# Altium PCB PCB1.PcbDoc
Units mm, origin at the board's own origin, x right, y up, seen from the top; angles counter-clockwise.
Board outline 152.4 x 101.6 mm, 2 copper layers (Top Layer, Bottom Layer); 46 components, 34 nets, 152 pads, 0 vias.
Unrouted connection lines stored in the file: 4.
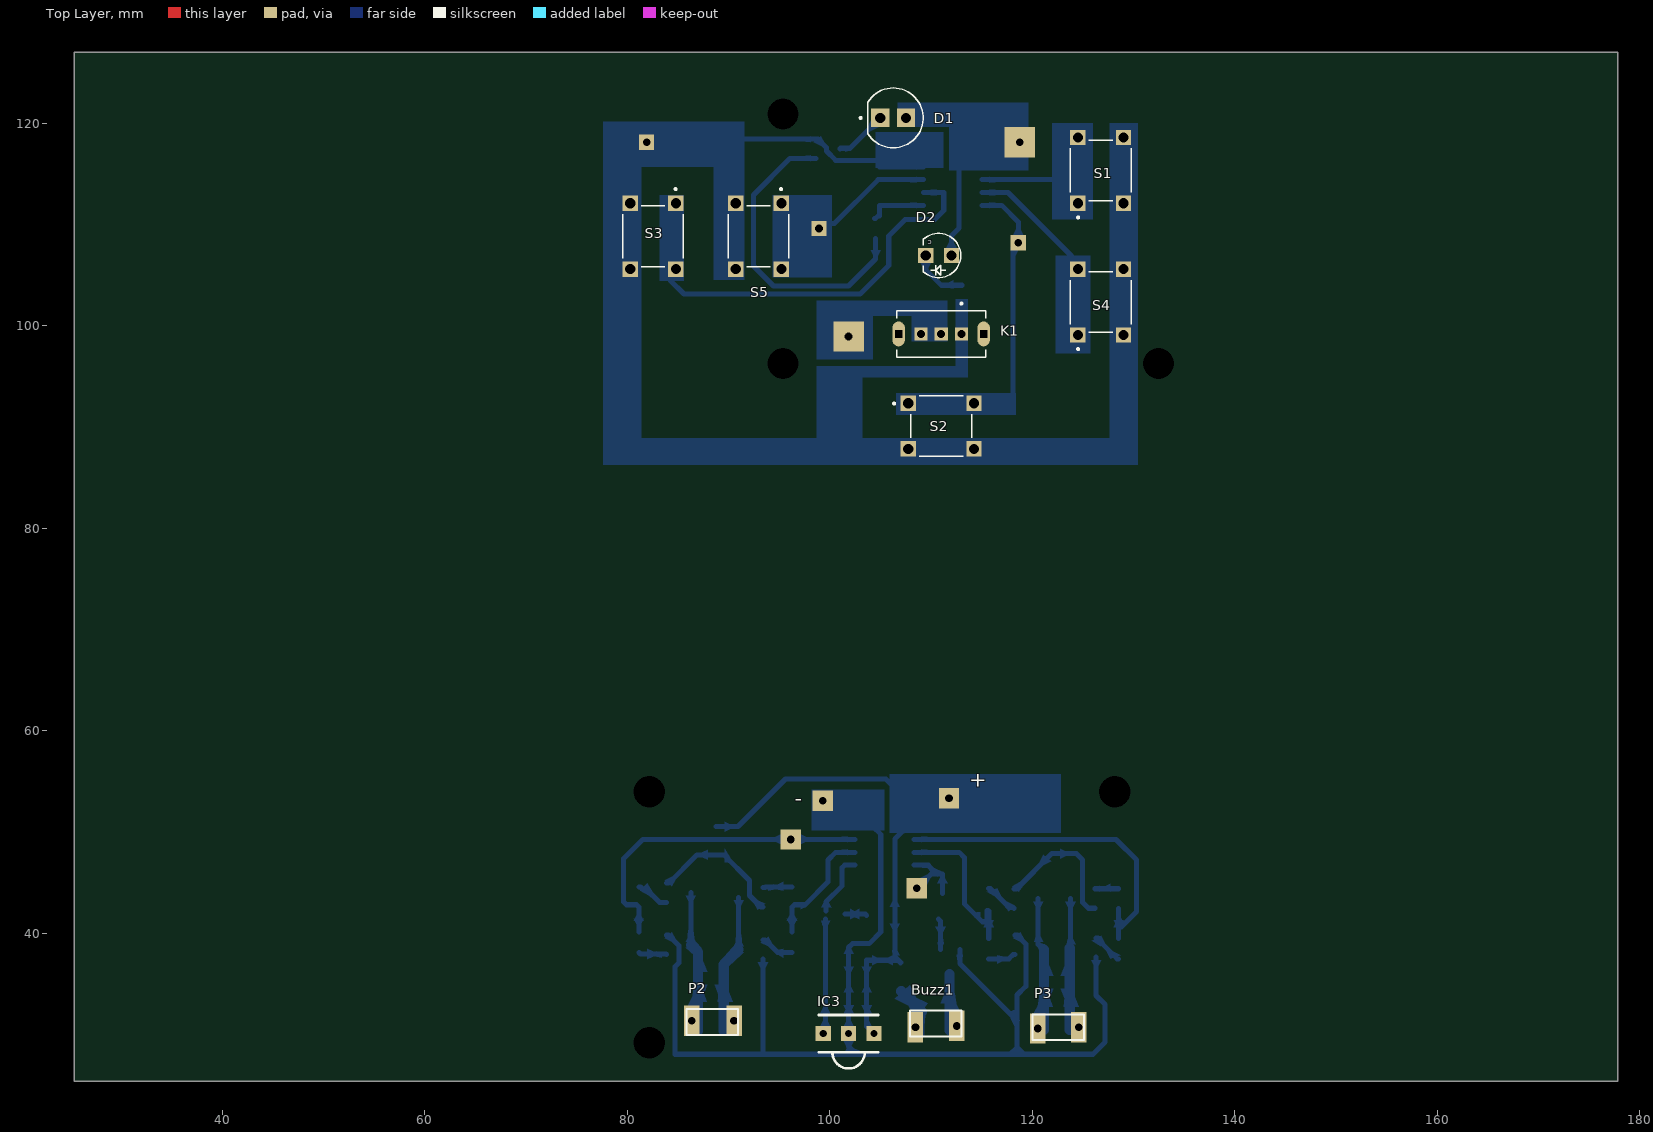
[diagram p0: Top Layer view]
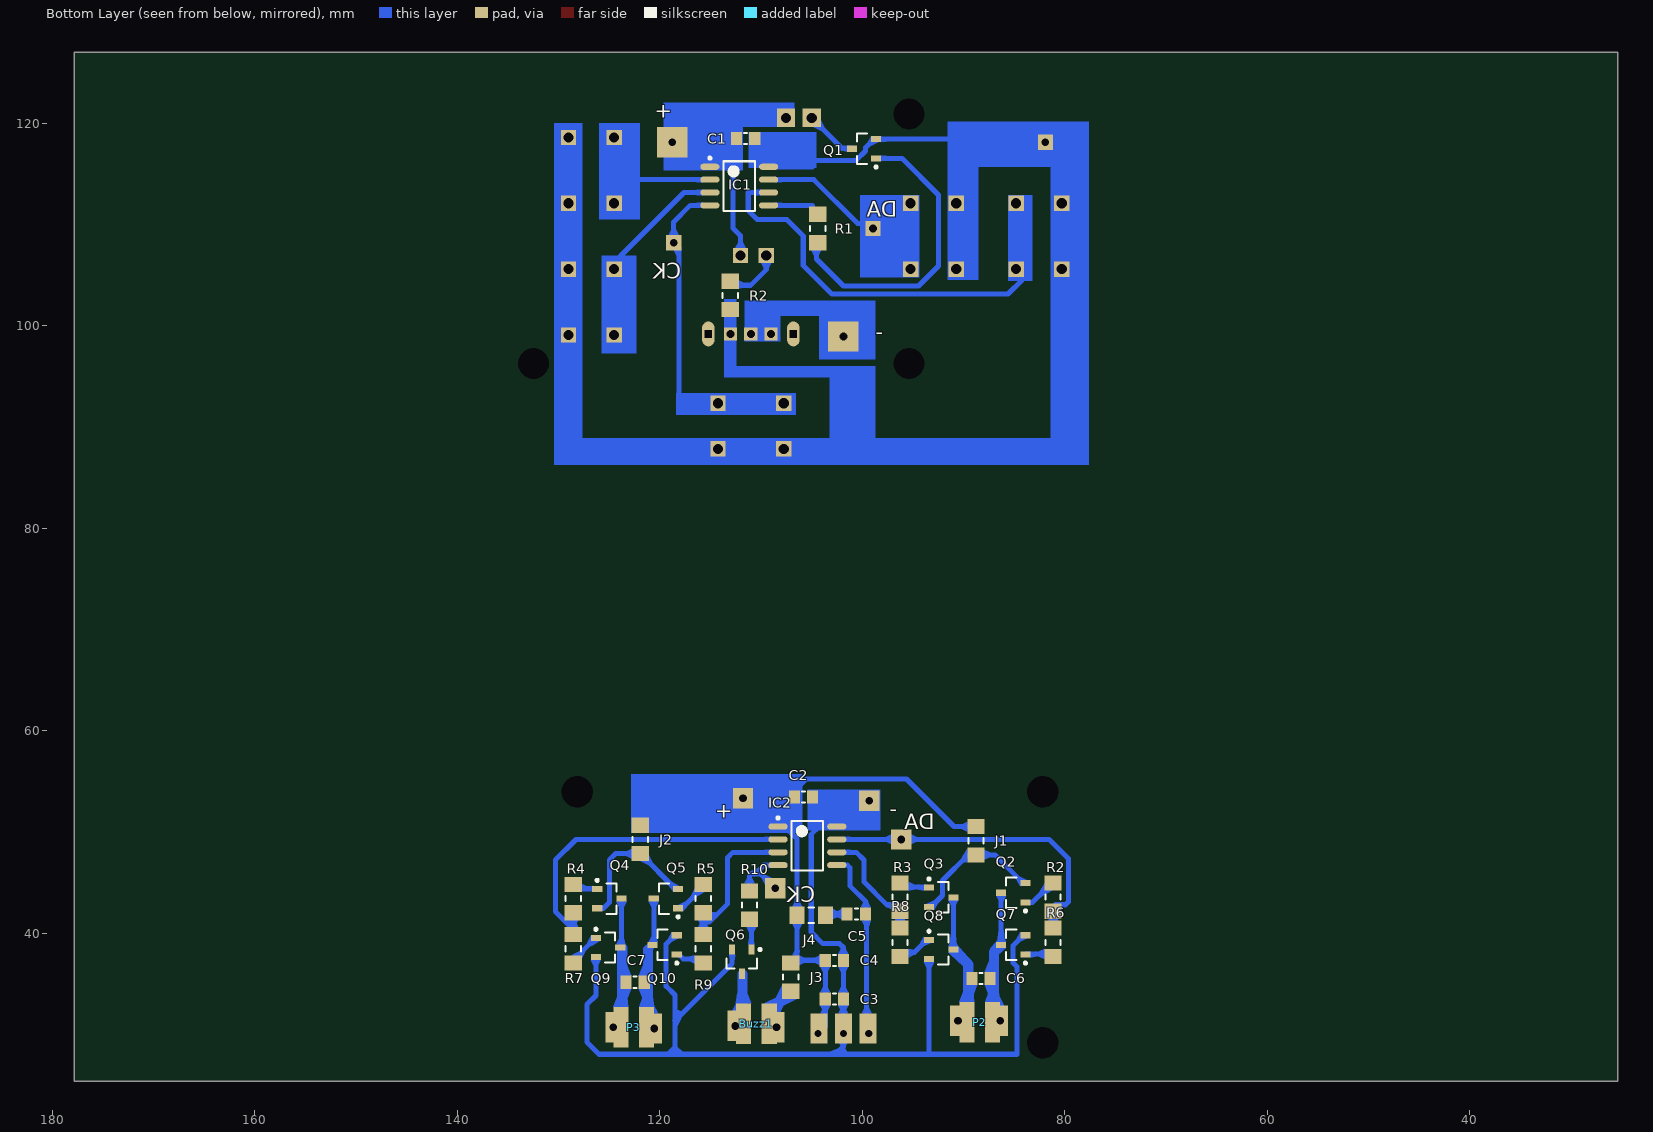
[diagram p1: Bottom Layer view, seen from below]
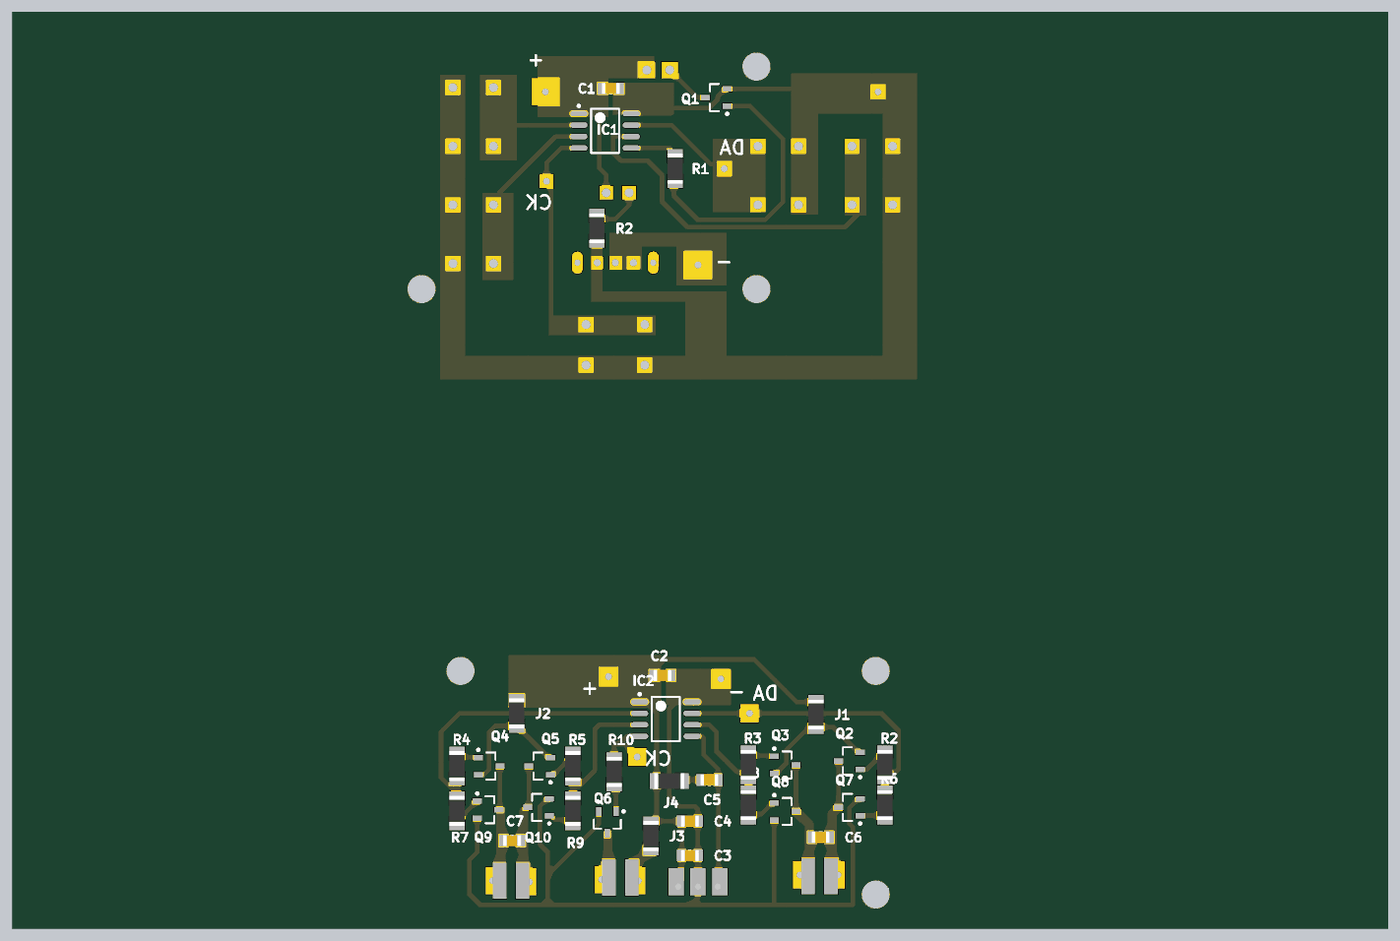
[diagram p2: 3D render of the assembled board from below, using the file's embedded part models]

## Layer stack, top to bottom
Top Solder: solder mask 0.0102, Solder Resist, Dk 3.5
Top Layer: signal copper 0.0356
Dielectric 1: dielectric 0.32, FR-4, Dk 4.8
Bottom Layer: signal copper 0.0356
Bottom Solder: solder mask 0.0102, Solder Resist, Dk 3.5

## Board outline
25.4,25.4 177.8,25.4 177.8,127 25.4,127

## Design rules (kind name [scope] priority, off if disabled: settings)
Clearance [All] p1: gap=0.3 ignorepadtopadclearanceinfootprint=FALSE
PolygonConnect [All] p1: connectstyle=Relief reliefconductorwidth=0.254 reliefentries=4 polygonreliefangle="90 Angle" airgapwidth=0.254
RoutingVias [All] p1: holewidth=0.711 width=1.27 viastyle="Through Hole" minholewidth=0.711 minwidth=1.27 maxholewidth=0.711 maxwidth=1.27
SolderMaskExpansion [All] p1: expansion=0.102
Width [All] p1: maxlimit=1 minlimit=0.254 preferedwidth=0.5
30 further rules are at their usual default settings.

## Classes and differential pairs
component class Sheet1: Buzz1 C1 C2 C3 C4 D1 IC1 IC2 IC3 P2 P3 Q1 Q2 Q3 Q4 Q5 Q6 Q7 Q8 Q9 Q10 R1 R2 R3 R4 R5 R6 R7 R8 R9 R10 S1 S2 S3 S5

## Components (designator, comment, footprint, x,y, rotation, side; value= is the part's Value field where it differs from the comment)
Buzz1 "Header 2" HDR1X2 109.18,31.097 r0 top
C1 "Capacitor" CAPC2012X08N-805 111.506,118.491 r180 bottom value=100n
C2 "Capacitor" CAPC2012X08N-805 105.791,53.467 r180 bottom value=100n
C3 "Capacitor" CAPC2012X08N-805 102.743,33.528 r180 bottom value=100u
C4 "Capacitor" CAPC2012X08N-805 102.743,37.338 r180 bottom value=100n
C5 "Capacitor" CAPC2012X08N-805 100.584,41.91 r180 bottom value=100n (schematic designator C4)
C6 "Capacitor" CAPC2012X08N-805 88.265,35.56 r180 bottom value=100n (schematic designator C4)
C7 "Capacitor" CAPC2012X08N-805 122.428,35.179 r180 bottom value=100n (schematic designator C4)
D1 "L08R5000Q1" LEDRD254W57D500H1070 106.252,120.523 r0 top
D2 "Comment" LED-3MM-ROUND 110.744,106.934 r180 top
IC1 "HT66f002" ht66f002 112.141,113.792 r180 bottom
IC2 "HT66f002" ht66f002 105.41,48.641 r180 bottom
IC3 "VS838" VS838 101.854,30.099 r90 top
J1 "Resistor" RESC3216X08N-1206 88.773,49.149 r90 bottom value=1k (schematic designator R111)
J2 "Resistor" RESC3216X08N-1206 121.92,49.276 r90 bottom value=1k (schematic designator R111)
J3 "Resistor" RESC3216X08N-1206 107.061,35.687 r90 bottom value=1k (schematic designator R111)
J4 "Resistor" RESC3216X08N-1206 105.029,41.783 r180 bottom value=1k (schematic designator R111)
K1 "Comment" SW_SS12D07VG4 110.998,99.187 r180 top
P2 "Header 2" HDR1X2 87.122,31.242 r0 top
P3 "Header 2" HDR1X2 123.825,30.734 r180 top
Q1 "c945" c945 99.822,117.475 r0 bottom
Q2 "PNP" pmbt8550 85.09,44.011 r0 bottom
Q3 "PNP" pmbt8550 92.202,43.561 r180 bottom
Q4 "PNP" pmbt8550 124.968,43.434 r180 bottom
Q5 "PNP" pmbt8550 119.38,43.434 r0 bottom
Q6 "NPN" MMBT8050 111.887,37.211 r270 bottom
Q7 "NPN" MMBT8050 85.09,38.862 r0 bottom
Q8 "NPN" MMBT8050 92.202,38.412 r180 bottom
Q9 "NPN" MMBT8050 125.095,38.608 r180 bottom
Q10 "NPN" MMBT8050 119.507,38.862 r0 bottom
R1 "Resistor" RESC3216X08N-1206 104.394,109.601 r270 bottom value=1K
R2 "Resistor" RESC3216X08N-1206 113.03,102.997 r270 bottom value=1K (schematic designator R1)
R2 "Resistor" RESC3216X08N-1206 81.153,43.577 r90 bottom value=1k
R3 "Resistor" RESC3216X08N-1206 96.266,43.577 r90 bottom value=1k
R4 "Resistor" RESC3216X08N-1206 128.524,43.434 r90 bottom value=1k
R5 "Resistor" RESC3216X08N-1206 115.697,43.434 r90 bottom value=1k
R6 "Resistor" RESC3216X08N-1206 81.153,39.116 r90 bottom value=1k
R7 "Resistor" RESC3216X08N-1206 128.524,38.481 r90 bottom value=1k
R8 "Resistor" RESC3216X08N-1206 96.266,39.116 r90 bottom value=1k
R9 "Resistor" RESC3216X08N-1206 115.697,38.481 r90 bottom value=1k
R10 "Resistor" RESC3216X08N-1206 111.125,42.799 r270 bottom value=1k
S1 "TS04-66-95-BK-100-SMT" SW_TS02-66-43-BK-160-SCR-D 126.746,115.339 r90 top
S2 "TS04-66-95-BK-100-SMT" SW_TS02-66-43-BK-160-SCR-D 110.998,90.091 r0 top
S3 "TS04-66-95-BK-100-SMT" SW_TS02-66-43-BK-160-SCR-D 82.55,108.839 r270 top
S4 "TS04-66-95-BK-100-SMT" SW_TS02-66-43-BK-160-SCR-D 126.746,102.339 r90 top
S5 "TS04-66-95-BK-100-SMT" SW_TS02-66-43-BK-160-SCR-D 92.964,108.839 r270 top

## Footprints (in the part's own frame and the unit in brackets; to place one, negate y for a bottom-side part, rotate by r counter-clockwise, add the part's x,y. Pads: shape width x height; smd on the part's side, far side on the other; paste and mask are expansions set on the pad)
c945 [mm] "SOT23, 3-Leads, Body 2.90x2.45mm, Pitch 0.95mm, IPC Medium Density"
  rect 1x0.6 smd: B(-1.2,0.95) C(1.2,0) E(-1.2,-0.95)
  silkscreen extent -1.32,-1.5 0.7,1.92, body extent -0.7,-1.5 0.7,1.5, height 1.1
CAPC2012X08N-805 [mm] "Chip Capacitor, 2-Leads, Body 2.00x1.25mm, IPC Medium Density"
  rect 1.1x1.3 smd: 1(-0.9,0) 2(0.9,0)
  silkscreen extent -0.15,-0.55 0.15,0.55, body extent -1,-0.63 1,0.63, height 0.8
HDR1X2 [mm] "Connector; Header; 2 Position"
  rect 1.5x4 smd far side: 1(0,0) 2(2.54,0)
  silkscreen extent -1.27,-1.27 3.81,1.27
ht66f002 [mm] "SOIC, 8-Leads, Body 4.90x3.90mm, Pitch 1.27mm, IPC Medium Density"
  oval 1.9x0.6 smd: 1(-2.9,1.905) 2(-2.9,0.635) 3(-2.9,-0.635) 4(-2.9,-1.905) 5(2.9,-1.905) 6(2.9,-0.635) 7(2.9,0.635) 8(2.9,1.905)
  silkscreen extent -3.03,-2.45 1.55,2.88, body extent -1.95,-2.45 1.95,2.45, height 1.75
LED-3MM-ROUND [mm]
  rect 1.508x1.508 hole 1: 1(1.27,0) 2(-1.27,0)
  silkscreen extent -2.19,-2.19 1.5,2.19
LEDRD254W57D500H1070 [mm]
  rect 1.815x1.815 hole 1: A(1.27,0) C(-1.27,0)
  silkscreen extent -3.3,-2.96 2.96,2.96
MMBT8050 [mm] "SOT23, 3-Leads, Body 2.90x2.45mm, Pitch 0.95mm, IPC Medium Density"
  rect 1x0.6 smd: 1(-1.2,0.95) 2(-1.2,-0.95) 3(1.2,0)
  silkscreen extent -1.32,-1.5 0.7,1.92, body extent -0.7,-1.5 0.7,1.5, height 1.1
pmbt8550 [mm] "SOT23, 3-Leads, Body 2.90x2.45mm, Pitch 0.95mm, IPC Medium Density"
  rect 1x0.6 smd: 1(-1.2,0.95) 2(-1.2,-0.95) 3(1.2,0)
  silkscreen extent -1.32,-1.5 0.7,1.92, body extent -0.7,-1.5 0.7,1.5, height 1.1
RESC3216X08N-1206 [mm] "Chip Resistor, 2-Leads, Body 3.20x1.60mm, IPC Medium Density"
  rect 1.5x1.7 smd: 1(-1.4,0) 2(1.4,0)
  silkscreen extent -0.25,-0.75 0.25,0.75, body extent -1.65,-0.85 1.65,0.85, height 0.8
SW_SS12D07VG4 [mm]
  rect 1.308x1.308 hole 0.8: 1(-2,0) 2(0,0) 3(2,0)
  oval 1.23x2.46 hole 0.7 square: S1(-4.2,0) S2(4.2,0)
  silkscreen extent -4.4,-3.1 4.4,2.3
SW_TS02-66-43-BK-160-SCR-D [mm]
  rect 1.508x1.508 / inner round 1.508 / far side rect 1.508x1.508 hole 1: 1(-3.25,2.25)
  rect 1.508x1.508 hole 1: 2(-3.25,-2.25) 3(3.25,2.25) 4(3.25,-2.25)
  silkscreen extent -4.75,-3 3,3
VS838 [mm]
  rect 1.5x1.5 hole 0.7: 1(0,2.5) 2(0,0) 3(0,-2.5)
  silkscreen extent -3.44,-2.95 1.84,2.95, body extent -3.42,-2.54 1.38,2.54, height 11

## Part data
Buzz1 P2 P3: "Header, 2-Pin", LatestRevisionDate=17-Jul-2002, LatestRevisionNote="Re-released for DXP Platform.", Publisher="Altium Limited"
C1 C2 C3 C4 C5 C6 C7: "Standard Bipolar Capasitor"
D1: "LED, Orange, Through Hole, T-1 3/4 (5mm), 30 mA, 2.1 V, 635 nm", Package=None, Availability=Unavailable, MP=L08R5000Q1, Price=None
J1 J2 J3 J4 R1 R2 R2 R3 R4 R5 R6 R7 R8 R9 R10: "Standard Resistor"
Q2 Q3 Q4 Q5: library part pmbt8550
Q6 Q7 Q8 Q9 Q10: library part MMBT8050
S1 S2 S3 S4 S5: "6 x 6 mm, 4.3~9.5 mm Actuator Height, 100~260 gf, Surface Mount, SPST, Tactile Switch", Package=None, Availability="In Stock", Check_prices=https://www.snapeda.com/parts/TS04-66-95-BK-100-SMT/CUI+Devices/view-part/?ref=eda, CUI_purchase_URL=https://www.cuidevices.com/product/switches/tactile-switches/ts04-series?utm_source=snapeda.com&utm_medium=referral&utm_campaign=snapedaBOM, MF="CUI Devices", MP=TS04-66-95-BK-100-SMT, Price=None, Purchase-URL=https://pricing.snapeda.com/search/part/TS04-66-95-BK-100-SMT/?ref=eda, SnapEDA_Link=https://www.snapeda.com/parts/TS04-66-95-BK-100-SMT/CUI+Devices/view-part/?ref=snap

## Free pads (board coordinates)
  round 1.524 hole 3.1: 2(132.461,96.266) 3(95.377,96.266) 4(95.377,120.904) 13(128.143,53.975) 14(82.169,53.975) 15(82.169,29.21)
  rect 1.524x1.524 hole 0.762: 5(118.618,108.204) 7(98.933,109.601)
  rect 3x3 hole 0.762: 6(118.745,118.11) 22(101.854,98.933)
  rect 1.5x1.5 hole 0.762: 8(81.915,118.11)
  rect 2x2 hole 0.762: 9(111.76,53.34) 10(99.314,53.086) 11(108.585,44.45) 12(96.139,49.276)
  rect 1.7x3 smd far side: 19(104.267,30.607) 20(101.854,30.607) 21(99.441,30.607)
  rect 1.524x3 hole 0.762: 23(90.551,31.369) 24(86.36,31.369) 25(108.458,30.734) 26(112.522,30.861) 27(120.523,30.607) 28(124.587,30.734)

## Nets (pads, with @x,y where several pads share a name; then routed paths per layer and width w, separated by ;. In a path a pad name is that pad's centre, name@x,y a point inside that pad or via, vN(x,y) a via of type N, cw(c..) or ccw(c..) an arc to the next point about the centre after c; other vN are vias at no path point)
C1: IC2.7 pad.12 R2.1@81.153,42.177 R6.2 | length 32.2
  Bottom Layer w0.5: R6.2@81.153,40.116 R6.2 81.153,42.177 81.153,42.577 80.903,42.827 79.926,42.827 79.629,43.124 79.629,47.371 81.534,49.276 87.668,49.276 87.695,49.249 89.851,49.249 89.878,49.276 pad.12 IC2.7
C2: IC2.6 R3.1 R8.2 | length 12.2
  Bottom Layer w0.5: R8.2@96.266,40.116 96.266,42.577 96.516,42.827 97.564,42.827 99.822,45.085 99.822,47.244 100.584,48.006 IC2.6
C3: IC2.4 pad.11 R10.1 | length 7.7
  Bottom Layer w0.5: IC2.4 109.728,46.736 110.617,45.847 ; pad.11 109.982,45.847 110.617,45.847 ; R10.1@111.125,43.942 R10.1 111.125,45.847 110.617,45.847
C4: IC2.2 R4.1 R7.2 | length 34.9
  Bottom Layer w0.5: IC2.2 128.27,49.276 130.302,47.244 130.302,42.164 128.778,40.64 128.524,40.894 128.524,42.434 R7.2@128.524,39.481
C5: IC2.3 R5.1 R9.2 | length 16.8
  Bottom Layer w0.5: IC2.3 112.776,48.006 113.284,47.498 113.284,42.926 115.062,41.148 115.531,41.148 115.531,42.268 115.613,42.268 115.697,42.184 R9.2@115.697,39.481
ICPCK: IC1.4 pad.5 S2.1 S2.3 | length 22.5
  Bottom Layer w0.5: IC1.4 116.967,111.887 118.618,110.236 pad.5 118.106,107.692 118.106,92.706 117.729,92.329
ICPDA: IC1.7 pad.7 S5.1 S5.3 | length 13.3
  Bottom Layer w0.5: 98.421,108.796 98.421,109.089 pad.7 99.445,110.113 100.461,110.113 104.775,114.427 IC1.7
key_1: IC1.2 S1.1 S1.3 | length 10.4
  Bottom Layer w0.5: IC1.2 122.158,114.427 S1.1
key_3: IC1.6 S3.1 S3.3 | length 38.1
  Bottom Layer w0.5: S3.3 84.582,105.371 84.582,104.648 84.205,104.648 84.201,104.644 84.201,104.521 85.598,103.124 102.997,103.124 105.823,105.95 105.823,108.871 107.442,110.49 110.363,110.49 111.252,111.379 111.252,113.157 IC1.6
key_4: IC1.3 S4.1 S4.3 | length 13
  Bottom Layer w0.5: IC1.3 117.602,113.157 123.869,106.89 123.869,106.216 S4.3
NetBuzz1_2: Buzz1.2 pad.26 Q6.3 | length 5.7
  Bottom Layer w0.5: pad.26@111.76,30.353 pad.26@111.837,30.43 ; Q6.3@111.837,35.961 Q6.3
  Bottom Layer w1: pad.26@111.837,30.43 Q6.3@111.837,35.961
NetD1_C: D1.C Q1.C | length 5.2
  Bottom Layer w0.5: Q1.C 101.072,117.525 101.984,117.525 D1.C
NetIC1_5: IC1.5 R1.1 | length 5.8
  Bottom Layer w0.5: R1.1@104.394,110.601 104.528,110.601 R1.1@104.778,110.851 ; R1.1@104.905,110.851 104.905,111.851 104.941,111.887 IC1.5
NetP2_1: C6.2 P2.1 pad.24 Q2.3 Q7.3 | length 14
  Bottom Layer w0.5: Q7.3 Q2.3
  Bottom Layer w1: Q7.3 86.995,38.157 86.995,35.56 pad.24@86.995,30.353
NetP2_2: C6.1 P2.2 pad.23 Q3.3 Q8.3 | length 13.8
  Bottom Layer w0.5: Q8.3 Q3.3
  Bottom Layer w1: P2.2@89.535,30.353 89.535,35.56 89.535,36.945 Q8.3
NetP3_1: C7.1 P3.1 pad.28 Q4.3 Q9.3 | length 13.1
  Bottom Layer w0.5: Q9.3@123.698,38.558 123.748,38.608 Q9.3@123.818,38.608 ; Q4.3 123.768,38.658 Q9.3@123.818,38.608 ; Q9.3 Q9.3@123.818,38.608
  Bottom Layer w1: P3.1@123.698,30.48 123.698,35.179 Q9.3@123.698,38.558
NetP3_2: C7.2 P3.2 pad.27 Q5.3 Q10.3 | length 13.2
  Bottom Layer w0.5: Q5.3 120.58,38.912 120.63,38.862 Q10.3 121.158,38.411
  Bottom Layer w1: pad.27@121.158,30.48 121.158,35.179 121.158,38.411
NetQ1_B: Q1.B R1.2 | length 30.7
  Bottom Layer w0.5: Q1.B 96.078,116.525 92.456,112.903 92.456,105.902 94.434,103.924 101.854,103.924 104.521,106.591 R1.2@104.521,108.601
NetQ2_1: Q2.1 R2.2@81.153,44.977 | length 3.4
  Bottom Layer w0.5: R2.2@81.153,44.577 81.303,44.577 81.553,44.327 81.911,44.327 83.177,43.061 Q2.1
NetQ3_1: Q3.1 R3.2 | length 2.9
  Bottom Layer w0.5: Q3.1 93.602,44.511 93.668,44.577 R3.2@96.266,44.577
NetQ4_1: Q4.1 R4.2 | length 2.4
  Bottom Layer w0.5: Q4.1 126.193,44.409 128.499,44.409 R4.2@128.524,44.434
NetQ5_1: Q5.1 R5.2 | length 3.3
  Bottom Layer w0.5: R5.2@115.697,44.434 115.847,44.434 117.747,42.534 118.13,42.534 Q5.1
NetQ6_1: Q6.1 R10.2 | length 3.1
  Bottom Layer w0.5: R10.2@110.744,41.402 110.937,41.209 Q6.1
NetQ7_1: Q7.1 R6.1 | length 2.8
  Bottom Layer w0.5: R6.1@81.153,38.116 81.307,37.962 83.84,37.962 Q7.1
NetQ8_1: Q8.1 R8.1 | length 3.4
  Bottom Layer w0.5: Q8.1 93.602,39.362 94.848,38.116 R8.1@96.266,38.116
NetQ9_1: Q9.1 R7.1 | length 3.2
  Bottom Layer w0.5: Q9.1 126.495,39.558 126.545,39.508 126.545,39.31 128.374,37.481 R7.1@128.524,37.481
NetQ10_1: Q10.1 R9.1 | length 2.8
  Bottom Layer w0.5: R9.1@115.697,37.481 117.676,37.481 118.107,37.912 Q10.1
rc: D2.1 R2.1@113.03,104.397 | length 5.6
  Bottom Layer w0.5: D2.1 109.474,105.537 111.014,103.997 R2.1@113.03,103.997
SIG: C5.2 IC2.5 IC3.1 pad.21 | length 17.7
  Bottom Layer w0.5: IC3.1 99.568,30.313 C5.2@99.568,41.402 ; C5.2@99.632,42.227 99.632,43.116 101.219,44.704 101.219,46.482 101.473,46.736 IC2.5
V+: C1.1 D1.A D2.2 IC1.1 pad.6 | length 9.3
  Bottom Layer w0.5: D2.2 112.014,108.891 112.776,109.653 112.776,115.697 112.903,115.824
V++: Buzz1.1 C2.1 C3.1 C4.1 C5.1 IC2.1 IC3.3 J1.1 J1.2 J2.1 J2.2 J3.1 J3.2 J4.1 J4.2 pad.9 pad.19 pad.25 Q2.2 Q3.2 Q4.2 Q5.2 | length 102.2
  Bottom Layer w0.5: Q2.2 84.09,44.961 86.881,47.752 89.535,47.752 92.075,45.212 92.075,43.738 93.202,42.611 Q3.2 ; J1.2@88.773,50.546 90.932,50.546 95.631,55.245 105.537,55.245 106.691,54.091 C2.1 106.691,51.515 IC2.1@107.66,50.546 ; C5.1 103.502,41.91 J4.2 ; C4.1 C4.1@103.632,37.349 ; IC3.3 103.632,30.821 C4.1@103.632,37.349 ; J3.2@106.461,37.587 J3.2@106.699,37.349 ; J3.2@106.711,37.349 J3.2@106.699,37.349 ; pad.25@109.093,29.972 Buzz1.1@109.093,32.255 ; Q5.2 118.425,44.384 121.92,47.879 124.333,47.879 124.968,47.244 124.968,43.053 125.537,42.484 Q4.2 ; J2.2@122.364,51.12 118.679,51.12 116.459,53.34 pad.9 111.76,52.578 109.728,50.546 IC2.1 IC2.1@107.66,50.546 ; C4.1@103.632,37.349 J3.2@106.699,37.349 ; J3.2@106.699,37.349 106.961,37.087 107.011,37.137 106.426,37.722 106.426,49.312 IC2.1@107.66,50.546
  Bottom Layer w1: J3.1 Buzz1.1@109.093,32.255
V-: C1.2 IC1.8 K1.1 pad.8 Q1.E R2.2@113.03,101.597 S1.2 S1.4 S2.2 S2.4 S3.2 S3.4 S4.2 S4.4 S5.2 S5.4 | length 33.1
  Bottom Layer w0.5: 84.836,118.364 84.897,118.425 Q1.E 98.822,118.425 99.666,117.581 99.666,117.253 100.587,116.332 105.791,116.332 ; 104.902,115.697 107.812,115.697 ; IC1.8 107.812,115.697 ; C1.2 110.606,118.391 110.306,118.091 110.206,118.091 107.812,115.697 ; K1.1 R2.2@112.998,101.854
V--: C2.2 C3.2 C4.2 IC2.8 IC3.2 pad.10 pad.20 Q6.2 Q7.2 Q8.2 Q9.2 Q10.2 | length 131.5
  Bottom Layer w0.5: Q7.2 84.09,39.812 85.09,38.812 85.09,37.084 84.709,36.703 84.709,28.067 93.472,28.067 ; Q8.2 93.402,28.137 93.472,28.067 ; pad.10 99.314,52.07 100.838,50.546 IC2.8 IC2.8@103.074,50.546 ; C4.2 C4.2@101.843,37.438 ; C2.2 104.891,53.367 103.12,51.596 103.12,50.592 IC2.8@103.074,50.546 ; Q6.2 112.837,37.023 118.491,31.369 ; Q10.2 118.507,39.812 119.357,38.962 119.357,34.775 118.491,33.909 118.491,31.369 ; Q9.2 126.295,33.872 127.174,32.993 127.174,29.257 125.984,28.067 118.491,28.067 ; 93.472,28.067 102.616,28.067 ; 102.616,28.067 118.491,28.067 ; 102.616,28.067 101.854,28.829 IC3.2 101.854,38.608 102.235,38.989 103.886,38.989 105.029,40.132 105.029,49.784 104.267,50.546 IC2.8@103.074,50.546 ; 118.491,28.067 118.491,31.369
v---: K1.2 K1.3 pad.22
pads on no net: K1.S1 K1.S2

## Polygon pours and split planes (outlines as drawn)
no net on Bottom Layer "Bottom Layer-No Net" (solid, pour order 0): 132.334,100.076

## Other copper
Bottom Layer:
  rectangle net V--: 98.171,50.165 105.41,54.229
  rectangle net V++: 105.918,49.911 122.809,55.753
  rectangle net V-: 98.679,88.011 103.251,96.012
  rectangle net V-: 99.06,94.869 113.665,96.012
  rectangle net V-: 112.395,94.869 113.665,102.616
  rectangle net v---: 98.679,96.647 104.267,101.6
  rectangle net v---: 98.679,100.965 111.633,102.489
  rectangle net v---: 108.077,98.425 111.633,102.362
  rectangle net key_4: 122.301,97.282 125.73,106.934
  rectangle net V-: 88.519,104.521 91.567,120.142
  rectangle net V-: 77.597,115.697 91.567,120.142
  rectangle net V-: 77.597,86.36 81.407,120.142
  rectangle net ICPCK: 106.553,91.186 118.364,93.345
  rectangle net V-: 77.597,86.233 130.302,88.9
  rectangle net V-: 127.635,86.233 130.429,120.015
  rectangle net key_1: 121.92,110.49 125.984,120.015
  rectangle net V-: 104.521,115.57 111.252,119.126
  rectangle net key_3: 83.185,104.394 85.598,112.903
  rectangle net ICPDA: 94.361,104.775 100.203,112.903
  rectangle net V+: 106.68,119.634 119.634,122.047
  rectangle net V+: 111.76,115.316 119.634,122.047

## Silkscreen, mask and mechanical layers (free items; w line width, h text height)
Top Overlay:
  text "+" at 113.792,54.483 h1.52
  text "-" at 96.52,52.578 h1.52
Bottom Overlay:
  text "+" at 118.745,120.523 h1.52
  text "DA" at 96.52,110.744 h1.52
  text "CK" at 117.856,104.648 h1.52
  text "-" at 97.917,98.679 h1.52
  text "-" at 96.52,51.562 h1.52
  text "+" at 112.776,51.435 h1.52
  text "DA" at 92.837,50.292 h1.52
  text "CK" at 104.648,43.053 h1.52
Mechanical 1:
  lines w0.254: 75.565,84.201 75.565,123.571 136.398,123.571 136.398,84.201 75.565,84.201 ; 78.613,26.289 78.613,57.15 131.191,57.15 131.191,26.289 78.613,26.289

## Text inside footprints (layer, text, board x,y; h text height)
D2: Top Overlay "C" at 110.044,108.434 h0.41 r180